# Altium PCB SHAJUN_VU_PCB.PcbDoc
Units mil, origin at the board's own origin, x right, y up, seen from the top; angles counter-clockwise.
Board outline 590.55 x 629.92 mil, 2 copper layers (Top Layer, Bottom Layer); 11 components, 67 nets, 31 pads, 97 vias.
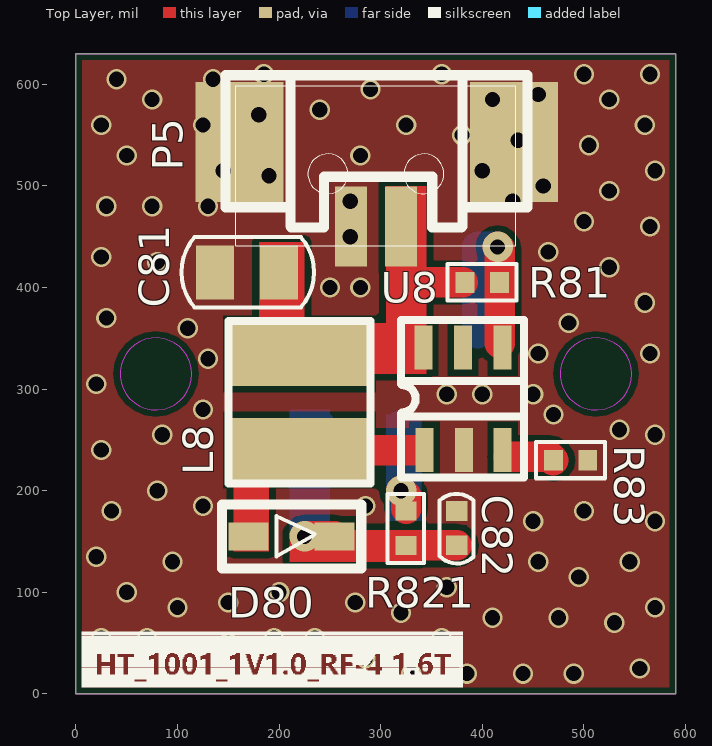
[diagram p0: Top Layer view]
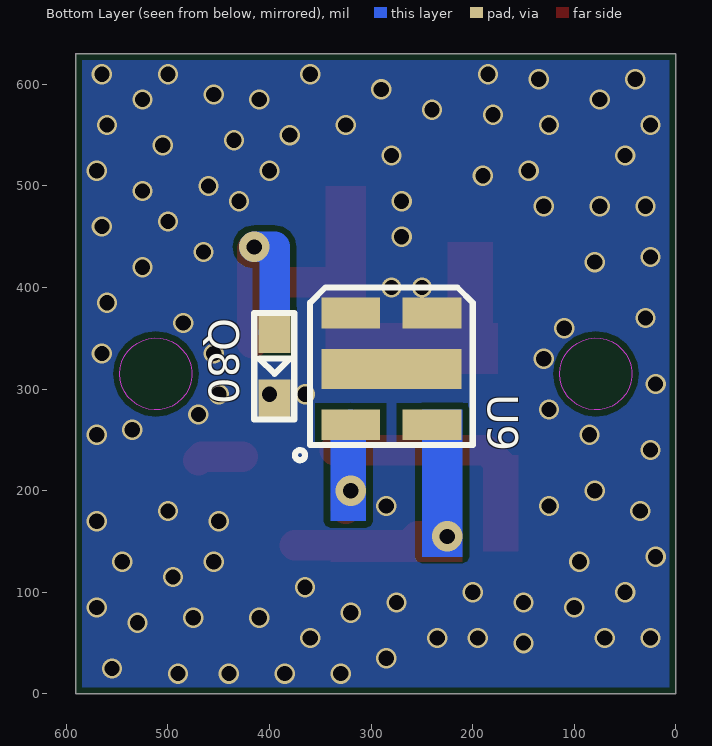
[diagram p1: Bottom Layer view, seen from below]

## Layer stack, top to bottom
Top Solder: solder mask 0.4, Solder Resist, Dk 3.5
Top Layer: signal copper 1.4
Dielectric 1: dielectric 12.6, FR-4, Dk 4.8
Bottom Layer: signal copper 1.4
Bottom Solder: solder mask 0.4, Solder Resist, Dk 3.5

## Board outline
0,0 0,629.92 590.55,629.92 590.55,0

## Design rules (kind name [scope] priority, off if disabled: settings)
Clearance [All] p1: gap=6 ignorepadtopadclearanceinfootprint=FALSE
ComponentClearance [All] p1: gap=0 collisioncheckmode=3 verticalgap=0 showdistances=FALSE
PlaneConnect [All] p1: planeconnectstyle=Direct reliefexpansion=20 reliefentries=4 reliefconductorwidth=10 reliefairgap=10
PolygonConnect [All] p1: connectstyle=Direct reliefconductorwidth=10 reliefentries=4 polygonreliefangle="90 Angle" airgapwidth=10
RoutingVias [All] p1: holewidth=30 width=20 viastyle="Through Hole" minholewidth=10 minwidth=15 maxholewidth=50 maxwidth=30
SolderMaskExpansion [All] p1: expansion=4
Width [All] p1: maxlimit=30 minlimit=6 preferedwidth=10
28 further rules are at their usual default settings.

## Components (designator, comment, footprint, x,y, rotation, side; value= is the part's Value field where it differs from the comment)
C81 "Cap" C0805 168.5,415 r180 top value=10uF
C82 "Cap" C0402 375,163.07 r90 top value=4.7uF
D80 "1N5819WS" SOD-323 212.32,155 r0 top
L8 "Inductor" CD32 220,287.24 r270 top value=22uH
P5 "UV/4.2V" CON_1.25MM_2P 296.02,501.59 r180 top
Q80 "Photo NPN" PT0603 415,375 r270 bottom
R81 "Res1" R0402 400,405 r180 top value=150K
R83 "Res1" R0402 486.93,230 r180 top value="1.6R 1%"
R821 "Res1" R0402 325,163.07 r270 top value=250R
U8 "DIO5661" SOT23-6-1 381,290.5 r0 top
U9 "UV_LED" SH35AH 205,245 r90 bottom

## Footprints (in the part's own frame and the unit in brackets; to place one, negate y for a bottom-side part, rotate by r counter-clockwise, add the part's x,y. Pads: shape width x height; smd on the part's side, far side on the other; paste and mask are expansions set on the pad)
C0402 [mm]
  rect 0.49x0.54 smd: 1(-0.43,0) 2(0.43,0)
  Top Layer pour cut-out: -0.071,-0.244 -0.071,0.244 0.071,0.244 0.071,-0.244 -0.071,-0.244
  silkscreen extent -0.88,-0.41 0.86,0.43
C0805 [mm]
  rect 0.95x1.35 smd: 1(-0.8,0) 2(0.8,0)
  silkscreen extent -1.67,-0.88 1.64,0.88
CD32 [mm]
  rect 1.6x3.5 smd: 1(-1.2,0) 2(1.2,0)
  silkscreen extent -2.03,-1.78 2.03,1.78
CON_1.25MM_2P [mm]
  rect 0.8x2 smd: 1(-0.609,1.056) 2(0.641,1.056)
  rect 2.2x3 smd: 3(3.429,-1.056) 4(-3.429,-1.056)
  silkscreen extent -3.77,-2.73 3.78,1.08
PT0603 [mil]
  rect 39.37x31.5 smd: 1(20,20) 3(85,20)
  silkscreen extent 0,0 105,39
R0402 [mm]
  rect 0.47x0.52 smd: 1(-0.43,0) 2(0.43,0)
  silkscreen extent -0.86,-0.46 0.87,0.45
SH35AH [mm]
  rect 0.77x1.47 smd: 1(0.508,2.921) 2(3.302,2.921) 3(0.508,0.889) 4(3.302,0.889)
  rect 1x3.5 smd: 5(1.905,1.905)
  silkscreen extent -0.38,-0.13 3.94,4.32
SOD-323 [mm]
  rect 1x0.7 smd: 1(-1.075,0) 2(1.075,0)
  silkscreen extent -1.74,-0.8 1.74,0.8
SOT23-6-1 [mm]
  rect 0.45x1.1 smd: 1(-0.965,-1.283) 2(0.025,-1.283) 3(0.991,-1.283) 4(0.991,1.283) 5(0,1.283) 6(-0.991,1.283)
  silkscreen extent -1.55,-1.97 1.52,1.97

## Part data
C81 C82: "电容", LatestRevisionDate=17-Jul-2002, LatestRevisionNote="Re-released for DXP Platform.", PackageDescription="Radial Cap, Thru-Hole; 2 Leads; 0.3 in Pin Spacing", PackageReference=RAD-0.3, Published=8-Jun-2000, Publisher="Altium Limited"
D80: library part "D Zener", "二极管", LatestRevisionDate=17-Jul-2002, LatestRevisionNote="Re-released for DXP Platform.", PackageDescription="Diode, Thru-Hole; 2 Leads; 0.7 in Pin Spacing", PackageReference=DIODE-0.7, Published=8-Jun-2000, Publisher="Altium Limited"
L8: "功率电感", Code_IEC=1005, Code_JEITA=0402, LatestRevisionDate=29-May-2009, LatestRevisionNote="IPC-7351 Footprint Added.", PackageDescription="Chip Inductor", PackageReference=0402-A, Published=8-Jun-2000, Publisher="Altium Limited"
P5: library part "Header 2", "UV灯电源接口", LatestRevisionDate=17-Jul-2002, LatestRevisionNote="Re-released for DXP Platform.", Publisher="Altium Limited"
Q80: "光敏三极管", Code_JEDEC=TO-220-AC, LatestRevisionDate=17-Jul-2002, LatestRevisionNote="Re-released for DXP Platform.", PackageReference=TO-220_A, Published=24-Mar-1999, Publisher="Altium Limited"
R81 R83 R821: "电阻", LatestRevisionDate=17-Jul-2002, LatestRevisionNote="Re-released for DXP Platform.", PackageDescription="Axial Device, Thru-Hole; 2 Leads; 0.3 in Pin Spacing", PackageReference=AXIAL-0.3, Published=8-Jun-2000, Publisher="Altium Limited"
U8: "恒流IC"

## Via types
v1: diameter 20, hole 15, Top Layer to Bottom Layer, 94 vias
v2: diameter 30, hole 15, Top Layer to Bottom Layer, 3 vias

## Nets (pads, with @x,y where several pads share a name; then routed paths per layer and width w, separated by ;. In a path a pad name is that pad's centre, name@x,y a point inside that pad or via, vN(x,y) a via of type N, cw(c..) or ccw(c..) an arc to the next point about the centre after c; other vN are vias at no path point)
BACK_LIGHT: 
BAT/4.2V: 
BAT_ADC: 
BLUE: 
CHARG_CHECK: 
COM1: 
COM2: 
COM3: 
COM4: 
GND: C81.2 C82.2 P5.2 P5.3 P5.4 Q80.3 R83.1 U8.2 U9.2 U9.4 U9.5
  other v1: 330,20 385,20 440,20 490,20 555,25 285,35 150,50 25,55 70,55 195,55 235,55 360,55 530,70 410,75 475,75 320,80 100,85 570,85 150,90 275,90 50,100 200,100 365,105 495,115 95,130 455,130 545,130 20,135 450,170 570,170 35,180 500,180 125,185 285,185 80,200 25,240 85,255 570,255 535,260 470,275 125,280 365,295 400,295 450,295 20,305 130,330 455,335 565,335 110,360 485,365 30,370 560,385 250,400 280,400 525,420 80,425 25,430 465,435 270,450 565,460 500,465 30,480 75,480 130,480 270,485 430,485 525,495 460,500 190,510 145,515 400,515 570,515 50,530 280,530 505,540 435,545 380,550 25,560 125,560 325,560 560,560 180,570 240,575 75,585 410,585 525,585 455,590 290,595 40,605 135,605 185,610 360,610 500,610 565,610
GREEN: 
LED_B: 
LED_G: 
LED_R: 
NetC23_2: 
NetC82_1: C82.1 D80.2 R821.2 U9.3 | length 278
  Top Layer w30: v2(225,155) D80.2 263.5,146.14 R821.2 C82.1
  Bottom Layer w30: v2(225,155) 226.06,156.06 226.06,264.84 226.22,265 U9.3
NetD3_2: 
NetD10_1: 
NetD10_2: 
NetD10_4: 
NetD11_1: 
NetD11_2: 
NetD11_4: 
NetD12_1: 
NetD12_2: 
NetD12_4: 
NetD13_1: 
NetD13_2: 
NetD13_4: 
NetD14_1: 
NetD14_2: 
NetD14_4: 
NetD15_1: 
NetD15_2: 
NetD15_4: 
NetD80_1: D80.1 L8.2 U8.1 | length 241.3
  Top Layer w30: D80.1 170,223.5 186.5,240 L8.2 U8.1@336,240
NetLS1_2: 
NetP6_1: 
NetQ2_1: 
NetQ3_1: 
NetQ3_3: 
NetQ6_1: 
NetQ6_3: 
NetQ10_1: 
NetQ11_1: 
NetQ12_1: 
NetQ80_1: Q80.1 R81.1 U8.4 | length 201.9
  Top Layer w30: v2(415,440) 416.93,438.07 R81.1 U8.4@416.93,344.93
  Bottom Layer w30: Q80.1@395.75,355.75 Q80.1 395,440 v2(415,440)
NetR50_2: 
NetR60_2: 
NetR83_2: R83.2 U8.3 | length 45.2
  Top Layer w30: U8.3@426.14,233.35 466.65,233.35 R83.2
NetR821_1: R821.1 U9.1 | length 84.9
  Top Layer w30: v2(320,200) 325,195 R821.1@325,182.14
  Bottom Layer w30: v2(320,200) U9.1
NTC_CHECK: 
NTC_VCC: 
RED: 
RX/TDS-: 
SEG1: 
SEG2: 
SEG3: 
SEG4: 
SEG5: 
SEG6: 
SPEAKER: 
TX/TDS+: 
USB/5.0V: 
UV_EN: 
VCC/3.0V: 
VU/4.2V: C81.1 L8.1 P5.1 R81.2 U8.6 | length 402.4
  Top Layer w30: C81.1 200,334.49 L8.1@215.51,334.49 ; L8.1@222.51,334.49 227,330 325,330 332,330 327,335 327,341 327,410 ; 325,405 R81.2@380.93,405 ; P5.1@327,460 327,410 ; 332,405 327,410
pads on no net: U8.5

## Polygon pours and split planes (outlines as drawn)
GND on Bottom Layer "Bottom Layer-GND" (solid, remove dead copper, pour order 0): -55,700 -50,695 690,695 690,-60 625,-125 610,-110 -55,-110
GND on Top Layer "Top Layer-GND" (solid, remove dead copper, pour order 2): -50,720 665,720 725,660 725,-40 -85,-40

## Keep-outs
Keep-Out Layer:
  circle w0.5: c78.74,314.96 r35.43
  circle w0.5: c511.81,314.96 r35.43
  lines w0.5: 0,0 0,629.92 590.55,629.92 590.55,0 0,0

## Other copper
Top Layer:
  rectangle net NetC82_1: 210,130 340,160
  rectangle net NetD80_1: 155,140 190,235
  rectangle net VU/4.2V: 180,340 225,445
  rectangle net VU/4.2V: 175,315 345,365
  rectangle net VU/4.2V: 305,315 345,500
Bottom Layer:
  rectangle net NetR821_1: 305,170 340,275
  rectangle net NetC82_1: 210,135 250,280

## Silkscreen, mask and mechanical layers (free items; w line width, h text height)
Top Overlay:
  drawing of 512 lines, arcs and shapes, not listed
Top Solder:
  drawing of 2202 lines, arcs and shapes, not listed
Bottom Solder:
  text "HUOTIANTECH.COM" at 10,10 h30